# Altium PCB FMC_DIO_32ch_lvds_a.PcbDoc (part 3 of 6)
Units mm, origin at the board's own origin, x right, y up, seen from the top; angles counter-clockwise.
Board outline 69.13 x 77.46 mm, 4 copper layers (Top Layer, G, SUP, Bottom Layer), stack 1.448 mm thick; 558 components, 348 nets, 1996 pads, 784 vias.
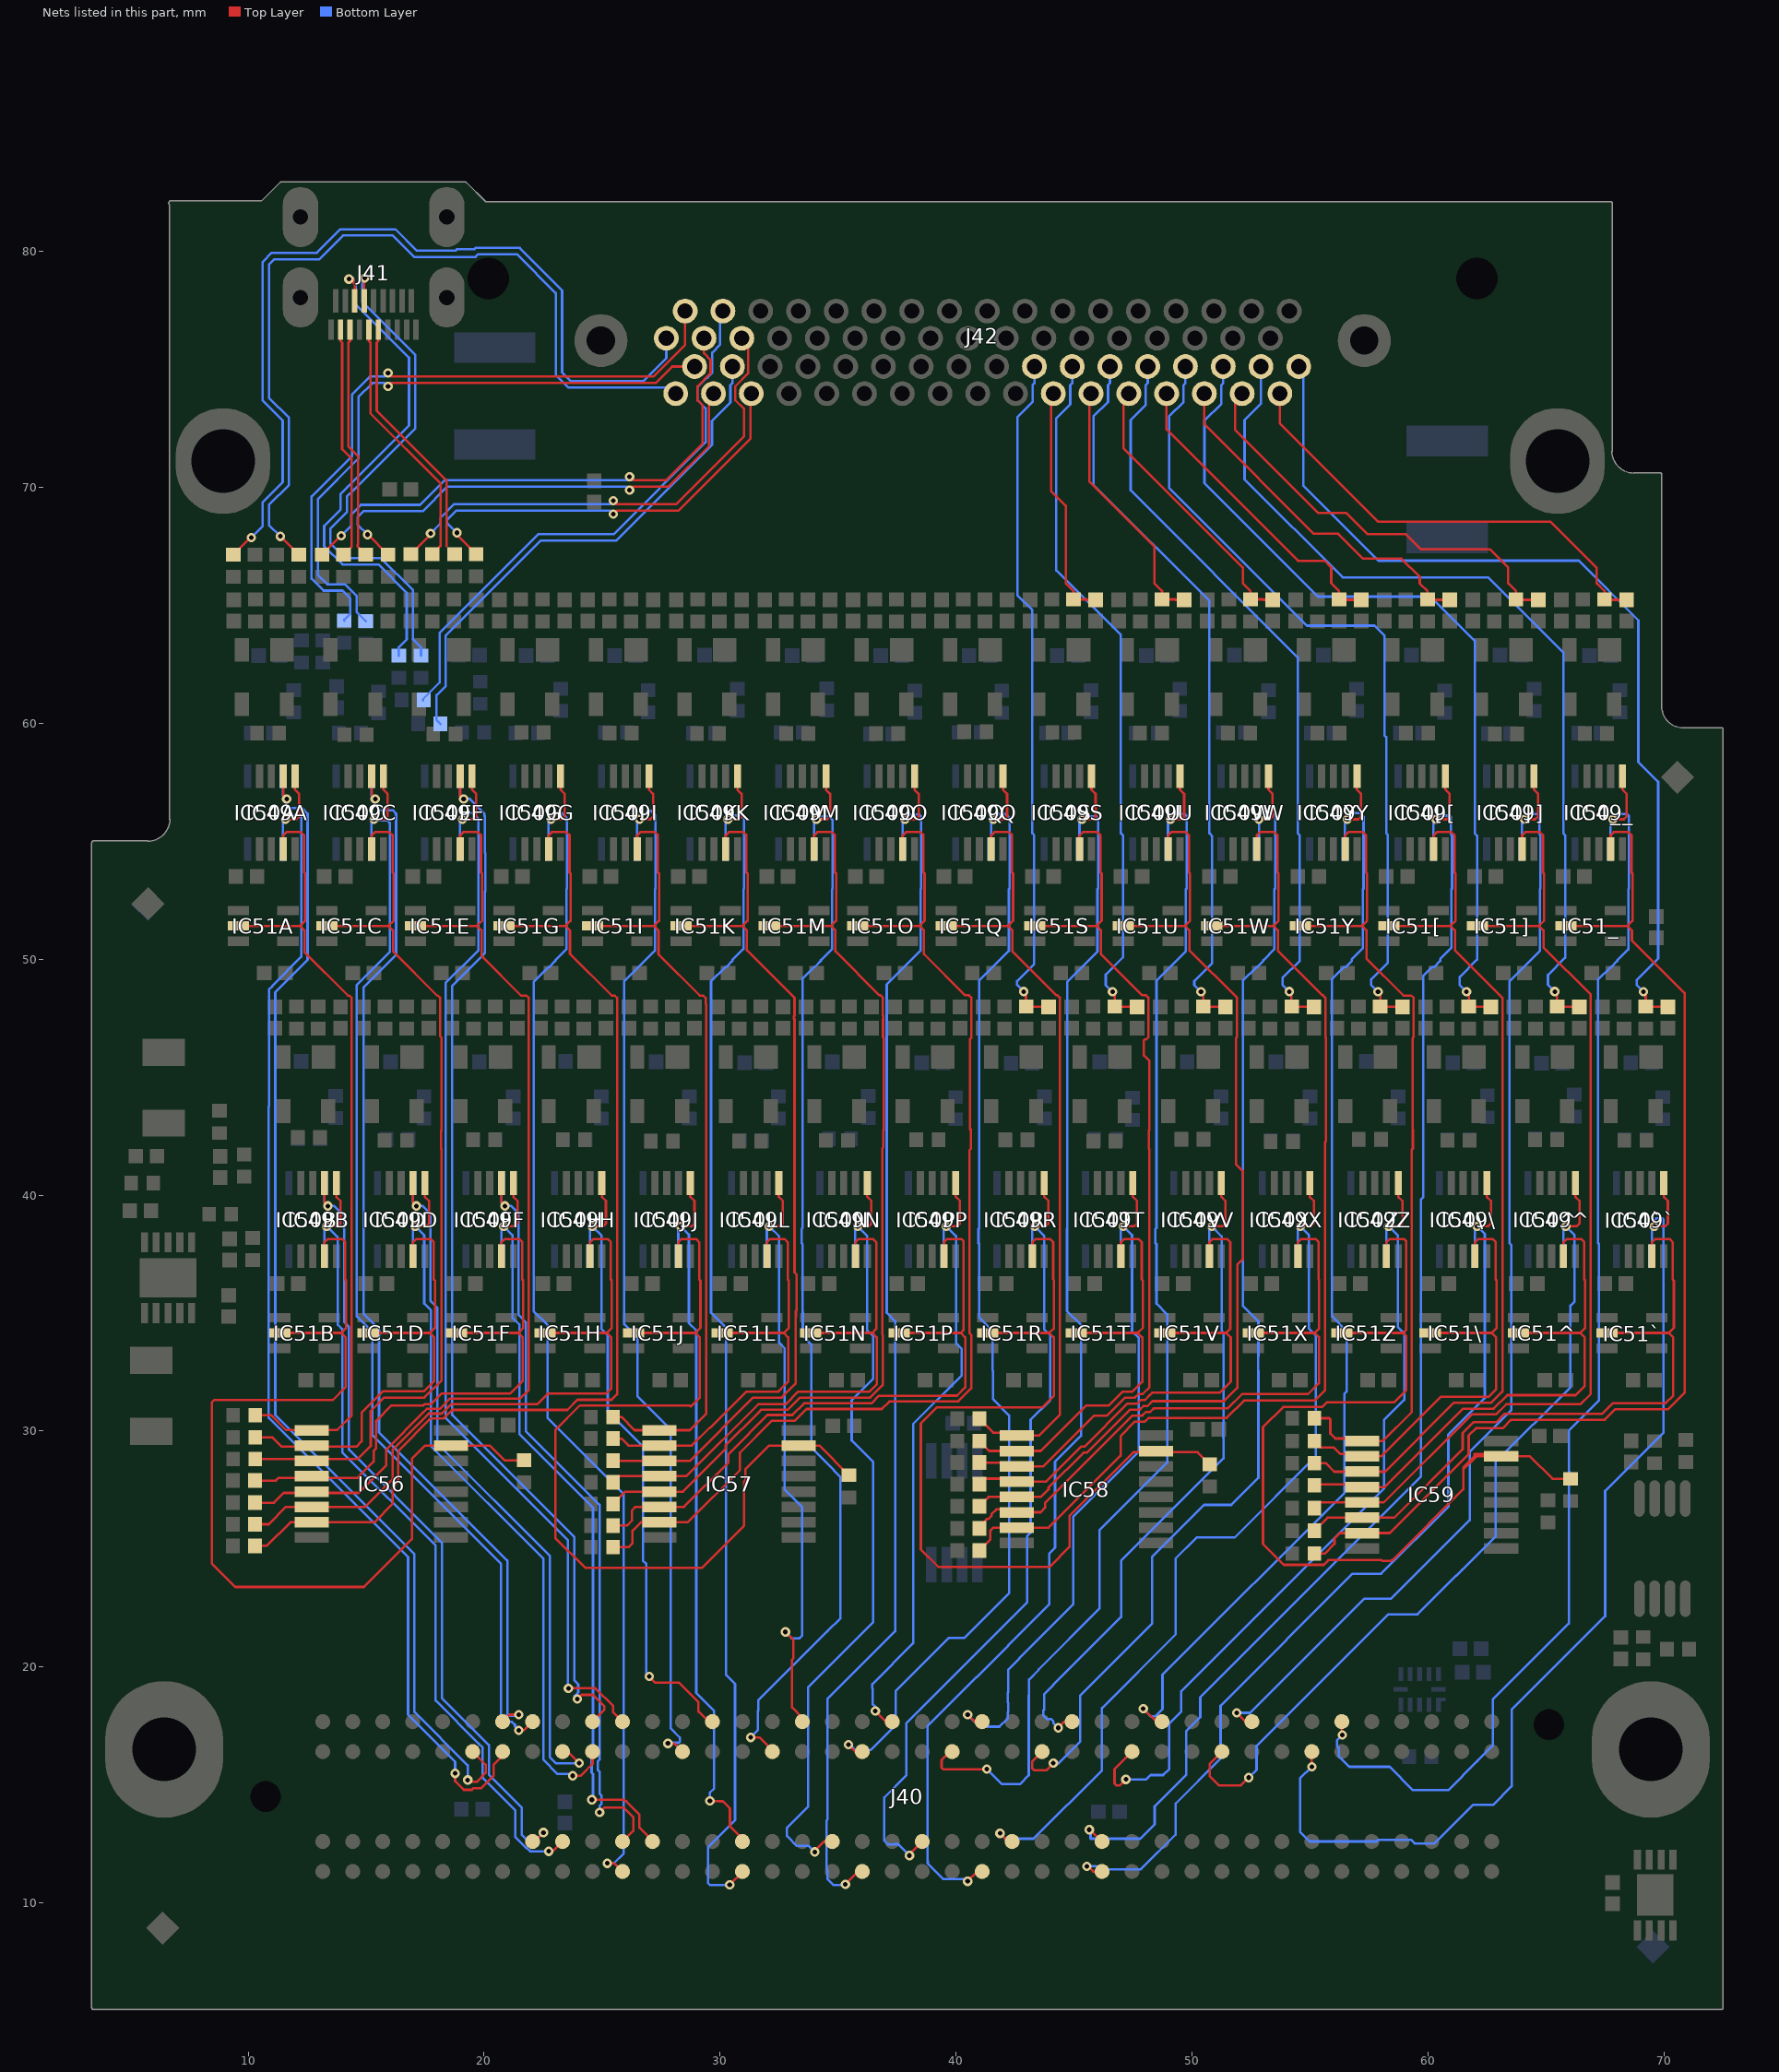
[diagram p5: the nets of this part, all layers, seen from the top]

## Via types
v1: diameter 0.4, hole 0.2, Top Layer to Bottom Layer, tented both sides, 760 vias
v2: diameter 0.4, hole 0.2, Top Layer to Bottom Layer, 24 vias

## Nets (pads, with @x,y where several pads share a name; then routed paths per layer and width w, separated by ;. In a path a pad name is that pad's centre, name@x,y a point inside that pad or via, vN(x,y) a via of type N, cw(c..) or ccw(c..) an arc to the next point about the centre after c; other vN are vias at no path point) (continued)
CON1_P18: C140R.1 J42.20 R243R.1 | length 29.1
  Top Layer w0.102: v1@42.961,48.621 42.961,48.011 R243R.1@42.973,47.999 42.981,47.991 C140R.1@43.9,47.991
  Bottom Layer w0.102: v1(42.866,48.628) 42.58,48.913 42.58,49.073 43.307,49.8 43.307,55.254 43.228,55.333 43.228,64.798 42.596,65.43 42.596,72.974 43.237,73.615 43.237,74.332 43.318,74.413 J42.20@43.318,75.117
CON1_P19: C140S.1 J42.21 R243S.1 | length 9.5
  Top Layer w0.102: 44.018,73.431 44.018,69.846 44.646,69.218 44.646,65.934 44.973,65.608 R243S.1@44.973,65.249 45.522,65.249 45.542,65.229 C140S.1@45.912,65.229
CON1_P20: C140T.1 J42.22 R243T.1 | length 29.9
  Top Layer w0.102: v1@46.723,48.609 R243T.1@46.723,47.999 46.743,47.979 C140T.1@47.662,47.979
  Bottom Layer w0.102: J42.22@44.918,75.117 44.918,74.413 44.837,74.332 44.837,73.514 44.247,72.923 44.247,66.472 46.978,63.741 46.978,55.333 47.066,55.245 47.066,50.076 46.342,49.352 46.342,48.901 v1(46.628,48.616)
CON1_P21: C140U.1 J42.23 R243U.1 | length 11
  Top Layer w0.102: J42.23@45.718,73.967 45.644,73.894 45.644,70.256 48.396,67.504 48.396,65.934 48.723,65.608 R243U.1@48.723,65.249 49.281,65.249 49.301,65.229 C140U.1@49.662,65.229
CON1_P22: C140V.1 J42.24 R243V.1 | length 30.9
  Top Layer w0.102: v1@50.473,48.609 R243V.1@50.473,47.999 50.493,47.979 C140V.1@51.412,47.979
  Bottom Layer w0.102: J42.24@46.518,75.117 46.518,74.413 46.437,74.332 46.437,73.615 45.822,73 45.822,70.1 50.728,65.194 50.728,55.333 50.851,55.21 50.851,49.832 50.092,49.073 50.092,48.901 v1(50.378,48.616)
CON1_P23: C140W.1 J42.25 R243W.1 | length 12
  Top Layer w0.102: J42.25@47.318,73.967 47.092,73.741 47.092,71.653 52.146,66.599 52.146,65.934 52.473,65.608 R243W.1@52.473,65.249 53.015,65.249 53.035,65.229 C140W.1@53.412,65.229
CON1_P24: C140X.1 J42.26 R243X.1 | length 31.7
  Top Layer w0.102: v1@54.211,48.621 54.211,48.011 R243X.1@54.223,47.999 54.231,47.991 C140X.1@55.15,47.991
  Bottom Layer w0.102: J42.26@48.118,75.117 48.118,74.413 48.037,74.332 48.037,73.488 47.396,72.847 47.396,69.872 54.478,62.79 54.478,55.333 54.559,55.252 54.559,49.929 53.83,49.2 53.83,48.913 v1(54.116,48.628)
CON1_P25: C140Y.1 J42.27 R243Y.1 | length 13.4
  Top Layer w0.102: J42.27@48.918,73.967 48.918,72.456 54.486,66.888 55.612,66.888 55.896,66.604 55.896,65.934 56.223,65.608 R243Y.1@56.223,65.249 56.243,65.229 C140Y.1@57.162,65.229
CON1_P26: C140Z.1 J42.28 R243Z.1 | length 34.3
  Top Layer w0.102: v1@57.973,48.609 R243Z.1@57.973,47.999 57.993,47.979 C140Z.1@58.912,47.979
  Bottom Layer w0.102: J42.28@49.718,75.117 49.718,74.413 49.637,74.332 49.637,73.615 49.022,73 49.022,69.977 54.864,64.135 57.734,64.135 58.15,63.719 58.15,59.489 58.228,59.411 58.228,55.333 58.293,55.268 58.293,49.85 57.592,49.149 57.592,48.901 v1(57.878,48.616)
CON1_P27: C140[.1 J42.29 R243[.1 | length 15.1
  Top Layer w0.102: J42.29@50.518,73.967 50.518,72.669 55.159,68.027 56.196,68.027 57.246,66.977 58.868,66.977 59.646,66.198 59.646,65.919 59.973,65.592 R243[.1@59.973,65.249 59.993,65.229 C140[.1@60.912,65.229
CON1_P28: C140\.1 J42.30 R243\.1 | length 36.4
  Top Layer w0.102: v1@61.723,48.609 R243\.1@61.723,47.999 61.743,47.979 C140\.1@62.662,47.979
  Bottom Layer w0.102: J42.30@51.318,75.117 51.318,74.413 51.237,74.332 51.237,73.538 50.521,72.822 50.521,70.18 55.334,65.367 60.105,65.367 61.978,63.494 61.978,55.333 62.078,55.233 62.078,49.986 61.342,49.251 61.342,48.901 v1(61.628,48.616)
CON1_P29: C140].1 J42.31 R243].1 | length 18.1
  Top Layer w0.102: J42.31@52.118,73.967 51.816,73.666 51.816,72.441 55.35,68.907 56.535,68.907 57.424,68.018 59.05,68.018 59.694,67.373 62.62,67.373 63.396,66.597 63.396,65.934 63.723,65.608 R243].1@63.723,65.249 63.743,65.229 C140].1@64.662,65.229
CON1_P30: C140^.1 J42.32 R243^.1 | length 38
  Top Layer w0.102: v1@65.461,48.621 65.461,48.011 R243^.1@65.473,47.999 65.481,47.991 C140^.1@66.4,47.991
  Bottom Layer w0.102: J42.32@52.918,75.117 52.918,73.546 52.222,72.851 52.222,70.333 56.375,66.18 62.544,66.18 65.728,62.995 65.728,55.333 65.811,55.25 65.811,50.058 65.08,49.327 65.08,48.913 v1(65.366,48.628)
CON1_P31: C140_.1 J42.33 R243_.1 | length 19.6
  Top Layer w0.102: J42.33@53.718,73.967 53.718,72.698 57.874,68.542 65.185,68.542 67.146,66.581 67.146,65.934 67.473,65.608 R243_.1@67.473,65.249 67.493,65.229 C140_.1@68.412,65.229
CON1_P32: C140`.1 J42.34 R243`.1 | length 39.8
  Top Layer w0.102: v1@69.223,48.609 R243`.1@69.223,47.999 69.243,47.979 C140`.1@70.162,47.979
  Bottom Layer w0.102: J42.34@54.518,75.117 54.712,74.923 54.712,70.066 57.887,66.891 66.379,66.891 68.91,64.36 68.91,58.353 69.748,57.514 69.748,50.03 68.842,49.124 68.842,48.901 v1(69.128,48.616)
CON1R1_N: J42.35 R267.1 | length 37.4
  Top Layer w0.102: R267.1@9.373,67.145 10.096,67.869 v1(10.135,67.869)
  Bottom Layer w0.102: v1(10.135,67.869) 10.617,68.351 10.617,69.366 11.463,70.211 11.463,72.831 10.617,73.677 10.617,79.549 11.002,79.934 12.907,79.934 13.91,80.937 16.239,80.937 17.149,80.027 18.79,80.027 18.849,80.086 19.581,80.086 19.637,80.142 21.505,80.142 23.304,78.342 23.304,74.867 23.673,74.498 26.746,74.498 27.718,75.47 J42.35@27.718,76.317
CON1R1_P: J42.1 R266.2 | length 36.2
  Top Layer w0.102: v1(11.367,67.92) R266.2@12.141,67.145
  Bottom Layer w0.102: v1(11.367,67.92) 10.884,68.402 10.884,69.255 11.73,70.101 11.73,72.942 10.884,73.787 10.884,79.439 11.112,79.667 13.018,79.667 14.021,80.67 16.129,80.67 17.039,79.761 19.633,79.761 19.747,79.875 21.395,79.875 23.038,78.232 23.038,74.756 23.562,74.231 27.853,74.231 J42.1@28.118,73.967
CON1R2_N: J42.36 R272.1 | length 28.1
  Top Layer w0.102: v1(15.926,74.838) 16.075,74.689 27.165,74.689 28.518,76.041 J42.36@28.518,77.467
  Bottom Layer w0.102: R272.1@14.072,64.351 14.072,64.389 14.329,64.647 14.329,65.287 13.995,65.621 13.195,65.621 12.687,66.129 12.687,69.607 14.409,71.329 14.409,73.939 15.159,74.689 15.777,74.689 v1(15.926,74.838)
CON1R2_P: J42.2 R271.2 | length 26.4
  Top Layer w0.102: v1(15.926,74.273) 16.075,74.422 27.276,74.422 27.971,75.117 J42.2@28.918,75.117
  Bottom Layer w0.102: R271.2@14.986,64.326 14.596,64.715 14.596,65.397 14.106,65.888 13.351,65.888 12.954,66.284 12.954,69.497 14.676,71.219 14.676,73.828 15.27,74.422 15.777,74.422 v1(15.926,74.273)
CON1R3_N: J42.37 R277.1 | length 23.4
  Top Layer w0.102: R277.1@13.132,67.145 13.932,67.945 v1(13.945,67.945) ; v1(26.162,70.444) 26.311,70.294 27.699,70.294 29.261,71.857 29.261,73.466 29.04,73.687 29.04,74.282 29.595,74.837 29.595,75.398 29.318,75.675 J42.37@29.318,76.317
  Bottom Layer w0.102: v1(13.945,67.945) 14.37,68.37 14.37,68.843 14.78,69.253 17.285,69.253 18.326,70.294 26.035,70.294 26.162,70.421 v1(26.162,70.444)
CON1R3_P: J42.3 R276.2 | length 20.7
  Top Layer w0.102: v1(15.062,67.996) 15.075,67.996 R276.2@15.926,67.145 ; v1(26.162,69.879) 26.311,70.028 27.809,70.028 29.527,71.746 29.527,73.777 J42.3@29.718,73.967
  Bottom Layer w0.102: v1(15.062,67.996) 14.637,68.421 14.637,68.732 14.891,68.986 17.395,68.986 18.437,70.028 26.035,70.028 26.162,69.901 v1(26.162,69.879)
CON1R4_N: J42.38 R282.1 | length 23.9
  Bottom Layer w0.102: R282.1@17.412,60.96 17.412,61.024 18.11,61.722 18.11,63.826 22.292,68.008 25.493,68.008 29.388,71.904 29.388,73.339 29.04,73.687 29.04,74.248 29.437,74.645 29.458,74.645 29.667,74.854 29.667,75.709 29.995,76.037 29.995,77.345 J42.38@30.118,77.467
CON1R4_P: J42.4 R281.2 | length 22.3
  Bottom Layer w0.102: R281.2@18.148,59.969 17.984,60.134 17.984,61.189 18.377,61.582 18.377,61.912 ; 18.377,61.925 18.377,61.912 ; J42.4@30.518,75.117 30.518,74.413 30.437,74.332 30.437,73.592 29.654,72.809 29.654,71.793 25.603,67.742 22.403,67.742 18.364,63.703 18.364,61.925 18.377,61.912
CON1R5_N: J42.39 R287.1 | length 21.2
  Top Layer w0.102: R287.1@16.891,67.17 17.767,68.047 v1(17.729,68.047) ; v1(25.476,69.428) 25.625,69.278 28.13,69.278 31.013,72.161 31.013,73.314 30.64,73.687 30.64,74.282 31.195,74.837 31.195,76.04 J42.39@30.918,76.317
  Bottom Layer w0.102: v1(17.729,68.047) 18.155,68.472 18.155,68.716 18.717,69.278 25.327,69.278 v1(25.476,69.428)
CON1R5_P: J42.5 R286.2 | length 18.3
  Top Layer w0.102: v1(18.847,68.072) 18.847,67.983 R286.2@19.66,67.17 ; v1(25.476,68.863) 25.625,69.012 28.241,69.012 31.28,72.051 31.28,73.93 J42.5@31.318,73.967
  Bottom Layer w0.102: v1(18.847,68.072) 18.421,68.497 18.421,68.605 18.828,69.012 25.327,69.012 v1(25.476,68.863)
DATA0_N: J41.11 R285.1 | length 10.4
  Top Layer w0.102: J41.11@15.516,76.68 15.516,76.2 15.45,76.133 15.45,73.243 18.415,70.278 18.415,67.501
DATA0_P: J41.9 R288.2 | length 10.9
  Top Layer w0.102: J41.9@15.116,76.68 15.116,76.2 15.183,76.133 15.183,73.133 18.148,70.168 18.148,67.513 R288.2@17.805,67.17
DATA1_N: J41.8 R280.1 | length 22
  Top Layer w0.102: J41.8@14.916,77.905 14.916,78.8 14.983,78.867 v1(14.935,78.867)
  Bottom Layer w0.102: 14.486,69.908 14.186,69.608 14.186,68.948 13.487,68.25 13.487,67.611 14.106,66.992 15.63,66.992 16.986,65.636 16.986,63.557 17.323,63.221 R280.1@17.323,62.865 ; 14.486,69.909 17.082,72.504 17.082,75.603 14.834,77.851 14.834,78.74 v1@14.961,78.867 ; v1(14.935,78.867) v1@14.961,78.867 ; v1@14.983,78.867 v1@14.961,78.867
DATA1_P: J41.6 R283.2 | length 22.5
  Top Layer w0.102: v1@14.27,78.792 v1(14.27,78.822) 14.27,78.846 14.249,78.867 14.418,78.867 14.469,78.815 14.469,78.674 14.516,78.627 J41.6@14.516,77.905
  Bottom Layer w0.102: 13.953,69.753 13.919,69.719 13.919,69.059 13.221,68.36 13.221,67.501 13.995,66.726 15.519,66.726 16.72,65.526 16.72,63.557 16.383,63.221 R283.2@16.383,62.865 ; 13.954,69.753 14.219,70.018 ; 14.219,70.019 16.815,72.615 16.815,75.493 14.567,77.741 14.567,78.576 14.469,78.674 14.469,78.838 14.44,78.867 14.249,78.867 14.27,78.846 v1(14.27,78.822) v1@14.27,78.792
DATA2_N: J41.5 R275.1 | length 9.9
  Top Layer w0.102: J41.5@14.316,76.68 14.316,76.2 14.25,76.133 14.25,71.726 14.656,71.319 14.656,67.581 14.643,67.568 14.643,67.488 R275.1@14.986,67.145
DATA2_P: J41.3 R278.2 | length 9.9
  Top Layer w0.102: J41.3@13.916,76.68 13.916,76.2 13.983,76.133 13.983,71.615 14.376,71.222 14.376,67.475 R278.2@14.046,67.145
EN1_RX1: IC49A.3 IC51A.2 IC56.1 R257.1 | length 34.4
  Top Layer w0.102: IC51A.2@9.586,51.411 12.196,51.411 ; R257.1@10.3,30.674 10.982,30.674 11.608,30.048 13.767,30.048 14.387,30.669 14.387,48.358 14.291,48.454 14.233,48.454 12.386,50.301 12.386,50.978 12.386,51.221 12.196,51.411 ; IC49A.3@11.486,54.661 11.486,55.252 11.623,55.389 12.231,55.389 12.365,55.255 12.365,53.678 12.413,53.63 12.413,51.628 12.196,51.411
EN1_RX2: IC49B.3 IC51B.2 IC56.15 R256.1 | length 41.7
  Top Layer w0.102: IC51B.2@11.336,34.161 13.946,34.161 ; IC49B.3@13.236,37.411 13.236,38.002 13.373,38.139 13.981,38.139 14.115,38.005 14.115,36.428 14.146,36.397 14.146,34.361 13.946,34.161 ; R256.1@21.768,28.766 20.866,28.766 20.244,29.387 IC56.15@18.596,29.387 17.5,29.387 16.942,28.829 16.942,25.425 14.91,23.393 9.449,23.393 8.458,24.384 8.458,31.217 8.56,31.318 13.589,31.318 14.136,31.866 14.136,33.971 13.946,34.161
EN1_RX3: IC49C.3 IC51C.2 IC56.3 R259.1 | length 38.5
  Top Layer w0.102: R259.1@10.3,28.82 14.646,28.82 15.196,29.369 15.196,30.849 15.766,31.42 17.468,31.42 18.186,32.138 18.186,41.959 ; IC51C.2@13.336,51.411 15.946,51.411 ; IC49C.3@15.236,54.661 15.236,55.252 15.373,55.389 15.981,55.389 16.115,55.255 16.115,53.678 16.163,53.63 16.163,51.628 15.946,51.411 ; 18.176,41.969 18.176,42.737 18.186,42.737 18.186,46.679 18.137,46.728 18.137,48.358 18.041,48.454 18.017,48.454 16.136,50.335 16.136,51.221 15.946,51.411
EN1_RX4: IC49D.3 IC51D.2 IC56.2 R258.1 | length 19.9
  Top Layer w0.102: R258.1@10.3,29.734 11.033,29.734 11.43,29.337 14.58,29.337 14.808,29.566 14.808,30.785 15.709,31.686 17.447,31.686 17.886,32.125 17.886,33.971 17.696,34.161 ; IC51D.2@15.086,34.161 17.696,34.161 ; IC49D.3@16.986,37.411 16.986,38.002 17.123,38.139 17.731,38.139 17.865,38.005 17.865,36.428 17.913,36.38 17.913,34.378 17.696,34.161
EN1_RX5: IC49E.3 IC51E.2 IC56.5 R261.1 | length 42.8
  Top Layer w0.102: R261.1@10.292,26.966 11.091,26.966 11.506,27.381 14.681,27.381 15.85,28.55 15.85,29.226 17.39,30.767 17.568,30.945 17.847,30.945 18.118,30.945 18.542,31.369 21.514,31.369 21.888,31.743 21.888,48.358 21.791,48.454 21.573,48.454 19.886,50.141 19.886,51.221 19.696,51.411 ; IC51E.2@17.086,51.411 19.696,51.411 ; IC49E.3@18.986,54.661 18.986,55.252 19.123,55.389 19.731,55.389 19.865,55.255 19.865,53.678 19.913,53.63 19.913,51.628 19.696,51.411
EN1_RX6: IC49F.3 IC51F.2 IC56.4 R260.1 | length 24.3
  Top Layer w0.102: R260.1@10.292,27.905 11.176,27.905 11.287,28.016 14.63,28.016 15.316,28.702 15.316,29.166 15.425,29.275 15.425,30.436 16.078,31.09 17.425,31.09 17.484,31.148 17.763,31.148 18.212,31.598 21.109,31.598 21.636,32.125 21.636,33.971 21.446,34.161 ; IC51F.2@18.836,34.161 21.446,34.161 ; IC49F.3@20.736,37.411 20.736,38.002 20.873,38.139 21.481,38.139 21.615,38.005 21.615,36.428 21.646,36.397 21.646,34.361 21.446,34.161
EN1_RX7: IC49G.3 IC51G.2 IC56.7 R263.1 | length 48.2
  Top Layer w0.102: R263.1@10.292,25.137 10.786,25.137 11.786,26.137 IC56.7@12.696,26.137 15.342,26.137 16.129,26.924 16.129,27.642 16.358,27.871 16.358,29.16 17.737,30.539 18.286,30.539 18.647,30.899 23.528,30.899 23.956,31.327 25.4,31.327 25.638,31.564 25.638,48.358 25.541,48.454 25.409,48.454 23.636,50.227 23.636,51.221 23.446,51.411 ; IC51G.2@20.836,51.411 23.446,51.411 ; IC49G.3@22.736,54.661 22.736,55.252 22.873,55.389 23.481,55.389 23.615,55.255 23.615,53.678 23.663,53.63 23.663,51.628 23.446,51.411
EN1_RX8: IC49H.3 IC51H.2 IC56.6 R262.1 | length 28.8
  Top Layer w0.102: R262.1@10.292,26.051 10.871,26.051 11.607,26.787 IC56.6@12.696,26.787 14.951,26.787 16.129,27.965 16.129,29.218 17.474,30.563 17.653,30.742 17.931,30.742 18.202,30.742 18.601,31.14 22.25,31.14 22.708,31.598 25.171,31.598 25.386,31.813 25.386,33.971 25.196,34.161 ; IC51H.2@22.586,34.161 25.196,34.161 ; IC49H.3@24.486,37.411 24.486,38.002 24.623,38.139 25.231,38.139 25.365,38.005 25.365,36.428 25.396,36.397 25.396,34.361 25.196,34.161
EN1_RX9: IC49I.3 IC51I.2 IC57.1 R269.1 | length 34.3
  Top Layer w0.102: IC51I.2@24.586,51.411 27.196,51.411 ; R269.1@25.464,30.598 25.816,30.598 26.376,30.037 IC57.1@27.428,30.037 28.716,30.037 29.414,30.735 29.414,31.825 29.414,48.081 29.388,48.108 29.388,48.209 ; IC49I.3@26.486,54.661 26.486,55.252 26.623,55.389 27.231,55.389 27.365,55.255 27.365,53.678 27.413,53.63 27.413,51.628 27.196,51.411 ; 29.388,48.209 29.388,48.358 29.291,48.454 29.143,48.454 27.386,50.211 27.386,50.825 27.386,51.221 27.196,51.411
EN1_RX10: IC49J.3 IC51J.2 IC57.15 R264.1 | length 39.3
  Top Layer w0.102: IC51J.2@26.336,34.161 28.946,34.161 ; IC49J.3@28.236,37.411 28.236,38.002 28.373,38.139 28.981,38.139 29.115,38.005 29.115,36.428 29.163,36.38 29.163,34.378 28.946,34.161 ; R264.1@35.458,28.131 34.202,29.387 IC57.15@33.328,29.387 32.08,29.387 31.064,28.372 31.064,27.904 31.005,27.846 31.005,25.976 29.235,24.206 24.282,24.206 23.017,25.471 23.017,30.047 24.056,31.085 28.706,31.085 28.753,31.039 29.136,31.422 29.136,33.971 28.946,34.161
EN1_RX11: IC49K.3 IC51K.2 IC57.3 R279.1 | length 37.6
  Top Layer w0.102: R279.1@25.464,28.743 25.47,28.737 IC57.3@27.428,28.737 28.712,28.737 31.394,31.419 32.613,31.419 33.198,32.004 33.198,34.823 33.209,34.834 33.209,35.084 33.239,35.115 33.239,36.635 33.15,36.725 33.15,47.463 33.125,47.488 33.125,47.571 33.15,47.596 33.15,48.363 31.136,50.377 31.136,51.221 30.946,51.411 ; IC51K.2@28.336,51.411 30.946,51.411 ; IC49K.3@30.236,54.661 30.236,55.252 30.373,55.389 30.981,55.389 31.115,55.255 31.115,53.678 31.163,53.63 31.163,51.628 30.946,51.411
EN1_RX12: IC49L.3 IC51L.2 IC57.2 R274.1 | length 19
  Top Layer w0.102: R274.1@25.464,29.683 25.816,29.683 26.112,29.387 IC57.2@27.428,29.387 28.803,29.387 29.566,30.15 29.591,30.15 31.114,31.673 32.47,31.673 32.574,31.777 32.574,31.787 32.886,32.099 32.886,33.971 32.696,34.161 ; IC51L.2@30.086,34.161 32.696,34.161 ; IC49L.3@31.986,37.411 31.986,38.002 32.123,38.139 32.731,38.139 32.865,38.005 32.865,36.428 32.913,36.38 32.913,34.378 32.696,34.161
EN1_RX13: IC49M.3 IC51M.2 IC57.5 R289.1 | length 42.2
  Top Layer w0.102: R289.1@25.464,26.915 25.986,27.437 IC57.5@27.428,27.437 28.431,27.437 30.226,29.232 30.226,29.388 31.625,30.786 31.748,30.91 32.87,30.91 33.38,31.42 34.447,31.42 36.364,31.419 36.89,31.945 36.89,34.076 36.868,34.099 36.868,41.986 ; IC51M.2@32.086,51.411 34.696,51.411 ; IC49M.3@33.986,54.661 33.986,55.252 34.123,55.389 34.731,55.389 34.865,55.255 34.865,53.678 34.913,53.63 34.913,51.628 34.696,51.411 ; 36.913,42.032 36.913,42.75 36.932,42.75 36.932,46.666 36.901,46.696 36.901,47.463 36.906,47.468 36.906,47.591 36.9,47.597 36.9,48.363 36.796,48.467 36.75,48.467 34.886,50.331 34.886,51.221 34.696,51.411
EN1_RX14: IC49N.3 IC51N.2 IC57.4 R284.1 | length 23.3
  Top Layer w0.102: R284.1@25.464,27.829 25.722,28.087 IC57.4@27.428,28.087 28.566,28.087 31.617,31.139 32.775,31.139 33.31,31.674 34.552,31.674 ; IC51N.2@33.836,34.161 36.446,34.161 ; 34.553,31.673 35.32,31.673 ; 35.321,31.674 35.452,31.674 ; 35.453,31.673 36.331,31.673 36.636,31.979 36.636,33.971 36.446,34.161 ; IC49N.3@35.736,37.411 35.736,38.002 35.873,38.139 36.481,38.139 36.614,38.007 36.614,34.328 36.446,34.161
EN1_RX15: IC49O.3 IC51O.2 IC57.7 R291.1 | length 47.5
  Top Layer w0.102: R291.1@25.464,25.086 26.127,25.086 26.289,25.248 26.289,25.781 26.645,26.137 IC57.7@27.428,26.137 28.626,26.137 30.836,28.346 30.836,29.083 32.193,30.44 33.162,30.44 33.659,30.937 34.247,30.937 ; 34.248,30.936 36.851,30.936 37.17,31.255 39.566,31.255 39.574,31.263 40.096,31.263 40.64,31.808 40.64,34.076 40.564,34.153 40.564,34.427 40.568,34.432 40.568,35.19 40.564,35.194 40.564,36.727 40.568,36.732 40.568,38.09 40.564,38.094 40.564,41.91 ; IC51O.2@35.836,51.411 38.446,51.411 ; IC49O.3@37.736,54.661 37.736,55.252 37.873,55.389 38.481,55.389 38.615,55.255 38.615,53.678 38.663,53.63 38.663,51.628 38.446,51.411 ; 40.618,41.964 40.618,42.785 40.585,42.785 40.585,46.605 40.65,46.67 40.65,48.363 40.546,48.467 40.382,48.467 38.636,50.213 38.636,51.221 38.446,51.411
EN1_RX16: IC49P.3 IC51P.2 IC57.6 R290.1 | length 28.3
  Top Layer w0.102: R290.1@25.464,26 26.061,26 26.264,26.203 26.264,26.635 26.416,26.787 IC57.6@27.428,26.787 28.46,26.787 30.353,28.68 30.353,29.018 30.467,29.132 30.467,29.146 32.002,30.681 33.062,30.681 33.559,31.178 34.347,31.178 ; 34.348,31.178 36.41,31.178 36.728,31.496 39.466,31.496 39.474,31.504 40.039,31.504 40.386,31.852 40.386,33.971 40.196,34.161 ; IC51P.2@37.586,34.161 40.196,34.161 ; IC49P.3@39.486,37.411 39.486,38.002 39.623,38.139 40.231,38.139 40.31,38.061 40.31,37.989 40.314,37.984 40.314,36.837 40.31,36.833 40.31,35.089 40.314,35.084 40.314,34.537 40.31,34.533 40.31,34.274 40.196,34.161
EN1_RX17: IC49Q.3 IC51Q.2 IC58.1 R293.1 | length 33.9
  Top Layer w0.102: IC51Q.2@39.586,51.411 42.196,51.411 ; R293.1@40.983,30.521 41.569,29.936 IC58.1@42.686,29.936 ; IC49Q.3@41.486,54.661 41.486,55.252 41.623,55.389 42.231,55.389 42.365,55.255 42.365,53.678 42.413,53.63 42.413,51.628 42.196,51.411 ; IC58.1@42.567,29.809 43.499,29.809 44.4,30.71 44.4,48.363 44.296,48.467 44.243,48.467 42.386,50.324 42.386,51.221 42.196,51.411
EN1_RX18: IC49R.3 IC51R.2 IC58.15 R292.1 | length 37.9
  Top Layer w0.102: IC51R.2@41.336,34.161 43.946,34.161 ; IC49R.3@43.236,37.411 43.236,38.002 43.373,38.139 43.981,38.139 44.115,38.005 44.115,36.428 44.146,36.397 44.146,34.361 43.946,34.161 ; R292.1@50.749,28.588 50.229,29.108 47.507,29.108 44.806,26.407 44.806,25.086 43.972,24.252 39.238,24.252 38.506,24.984 38.506,30.328 39.188,31.009 43.658,31.009 44.136,31.487 44.136,33.971 43.946,34.161
EN1_RX19: IC49S.3 IC51S.2 IC58.3 R295.1 | length 37.6
  Top Layer w0.102: R295.1@40.983,28.667 42.408,28.667 IC58.3@42.567,28.509 43.698,28.509 44.347,29.157 45.844,30.655 46.396,30.655 47.16,31.419 47.575,31.419 47.728,31.572 47.904,31.572 48.188,31.856 48.188,41.939 ; IC51S.2@43.336,51.411 45.946,51.411 ; IC49S.3@45.236,54.661 45.236,55.252 45.373,55.389 45.981,55.389 46.115,55.255 46.115,53.678 46.163,53.63 46.163,51.628 45.946,51.411 ; 48.163,41.964 48.163,42.756 48.188,42.756 48.188,45.691 47.955,45.923 47.955,46.558 47.989,46.592 48.046,46.592 48.15,46.696 48.15,48.363 48.046,48.467 47.875,48.467 46.136,50.206 46.136,51.221 45.946,51.411
EN1_RX20: IC49T.3 IC51T.2 IC58.2 R294.1 | length 18.6
  Top Layer w0.102: R294.1@40.983,29.582 41.406,29.159 IC58.2@42.567,29.159 43.586,29.159 45.517,31.09 46.471,31.09 47.055,31.673 47.47,31.673 47.886,32.089 47.886,33.971 47.696,34.161 ; IC51T.2@45.086,34.161 47.696,34.161 ; IC49T.3@46.986,37.411 46.986,38.002 47.123,38.139 47.731,38.139 47.865,38.005 47.865,36.428 47.913,36.38 47.913,34.378 47.696,34.161
EN1_RX21: IC49U.3 IC51U.2 IC58.5 R297.1 | length 41.9
  Top Layer w0.102: R297.1@40.983,26.813 41.379,27.209 IC58.5@42.567,27.209 43.592,27.209 43.917,27.534 43.917,27.606 45.393,29.083 45.542,29.083 47.37,30.911 47.786,30.911 47.939,31.064 48.115,31.064 48.318,31.267 51.35,31.267 51.917,31.835 51.917,37.058 52.146,37.287 52.146,41.021 51.868,41.3 51.868,42.746 51.853,42.746 51.853,46.648 51.9,46.696 51.9,48.363 49.886,50.377 49.886,51.221 49.696,51.411 ; IC51U.2@47.086,51.411 49.696,51.411 ; IC49U.3@48.986,54.661 48.986,55.252 49.123,55.389 49.731,55.389 49.865,55.255 49.865,53.678 49.913,53.63 49.913,51.628 49.696,51.411
EN1_RX22: IC49V.3 IC51V.2 IC58.4 R296.1 | length 22.9
  Top Layer w0.102: R296.1@40.983,27.753 41.216,27.986 IC58.4@42.686,27.986 ; IC58.4@42.567,27.859 43.81,27.859 45.288,29.337 45.437,29.337 47.265,31.165 47.68,31.165 47.834,31.318 48.01,31.318 48.225,31.534 48.315,31.623 51.17,31.623 51.636,32.089 51.636,33.971 51.446,34.161 ; IC51V.2@48.836,34.161 51.446,34.161 ; IC49V.3@50.736,37.411 50.736,38.002 50.873,38.139 51.481,38.139 51.615,38.005 51.615,34.33 51.446,34.161
EN1_RX23: IC49W.3 IC51W.2 IC58.7 R299.1 | length 46.9
  Top Layer w0.102: R299.1@40.983,24.933 41.451,25.401 41.451,25.781 41.578,25.909 IC58.7@42.567,25.909 43.917,25.909 46.968,28.96 46.968,29.791 47.581,30.403 47.996,30.403 48.149,30.556 49.829,30.556 49.834,30.561 51.466,30.561 52.197,31.293 55.194,31.293 55.626,31.725 55.626,42.24 ; IC51W.2@50.836,51.411 53.446,51.411 ; IC49W.3@52.736,54.661 52.736,55.252 52.873,55.389 53.481,55.389 53.615,55.255 53.615,53.678 53.663,53.63 53.663,51.628 53.446,51.411 ; 55.663,42.277 55.663,42.738 55.669,42.738 55.669,46.678 55.65,46.697 55.65,48.363 55.546,48.467 55.52,48.467 53.636,50.351 53.636,51.221 53.446,51.411
EN1_RX24: IC49X.3 IC51X.2 IC58.6 R298.1 | length 27.6
  Top Layer w0.102: R298.1@40.983,25.873 40.983,25.962 41.295,26.274 41.368,26.274 41.502,26.408 41.502,26.481 41.707,26.686 IC58.6@42.686,26.686 ; IC58.6@42.567,26.559 43.577,26.559 43.764,26.746 43.764,26.946 47.475,30.657 47.891,30.657 48.044,30.81 48.22,30.81 48.372,30.963 51.508,30.963 52.117,31.572 54.915,31.572 55.372,32.029 55.372,33.985 55.196,34.161 ; IC51X.2@52.586,34.161 55.196,34.161 ; IC49X.3@54.486,37.411 54.486,38.002 54.623,38.139 55.231,38.139 55.365,38.005 55.365,36.428 55.372,36.421 55.372,34.337 55.196,34.161
EN1_RX25: IC49Y.3 IC51Y.2 IC59.1 R301.1 | length 35.3
  Top Layer w0.102: IC51Y.2@54.586,51.411 57.196,51.411 ; R301.1@55.182,30.547 55.813,30.547 55.855,30.505 55.855,29.896 56.065,29.686 57.197,29.686 IC59.1@57.197,29.58 58.079,29.58 59.309,30.81 59.309,41.924 ; IC49Y.3@56.486,54.661 56.486,55.252 56.623,55.389 57.231,55.389 57.365,55.255 57.365,53.678 57.413,53.63 57.413,51.628 57.196,51.411 ; 59.355,41.969 59.355,42.772 59.348,42.772 59.348,46.661 59.387,46.701 59.387,48.358 59.291,48.454 58.962,48.454 57.386,50.03 57.386,51.221 57.196,51.411
EN1_RX26: IC49Z.3 IC51Z.2 IC59.15 R300.1 | length 40.4
  Top Layer w0.102: IC51Z.2@56.336,34.161 58.946,34.161 ; IC49Z.3@58.236,37.411 58.236,38.002 58.373,38.139 58.981,38.139 59.068,38.053 59.068,34.282 58.946,34.161 ; IC59.15@63.086,29.036 61.98,29.036 61.959,29.015 61.959,28.927 61.493,28.462 61.493,28.372 ; R300.1@66.04,27.978 65.265,27.978 64.313,28.93 IC59.15@63.097,28.93 62.052,28.93 61.493,28.372 ; 58.946,34.161 59.068,34.039 59.068,31.725 58.56,31.217 55.702,31.217 55.507,31.022 53.856,31.022 53.002,30.167 53.002,25.217 53.883,24.336 53.896,24.336 53.899,24.333 55.575,24.333 55.778,24.536 58.016,24.536 58.05,24.503 58.435,24.503 58.468,24.536 58.496,24.536 61.493,27.534 61.493,28.372
EN1_RX27: IC49[.3 IC51[.2 IC59.3 R303.1 | length 38.3
  Top Layer w0.102: R303.1@55.182,28.642 55.661,28.642 56.023,28.28 IC59.3@57.197,28.28 58.176,28.28 61.1,31.204 62.674,31.204 63.15,31.68 63.15,48.363 61.136,50.377 61.136,51.221 60.946,51.411 ; IC51[.2@58.336,51.411 60.946,51.411 ; IC49[.3@60.236,54.661 60.236,55.252 60.373,55.389 60.981,55.389 61.115,55.255 61.115,53.678 61.163,53.63 61.163,51.628 60.946,51.411
EN1_RX28: IC49\.3 IC51\.2 IC59.2 R302.1 | length 19.7
  Top Layer w0.102: R302.1@55.182,29.582 55.461,29.302 56.007,29.302 56.273,29.036 IC59.2@57.186,29.036 ; IC59.2@57.197,28.93 58.013,28.93 60.541,31.458 62.569,31.458 62.886,31.775 62.886,33.971 62.696,34.161 ; IC51\.2@60.086,34.161 62.696,34.161 ; IC49\.3@61.986,37.411 61.986,38.002 62.123,38.139 62.731,38.139 62.865,38.005 62.865,36.428 62.896,36.397 62.896,34.361 62.696,34.161
EN1_RX29: IC49].3 IC51].2 IC59.5 R305.1 | length 42.6
  Top Layer w0.102: R305.1@55.182,26.737 55.425,26.98 IC59.5@57.197,26.98 58.12,26.98 61.849,30.709 62.879,30.709 63.311,31.14 66.456,31.14 66.887,31.572 66.887,48.505 64.886,50.506 64.886,51.221 64.696,51.411 ; IC51].2@62.086,51.411 64.696,51.411 ; IC49].3@63.986,54.661 63.986,55.252 64.123,55.389 64.731,55.389 64.865,55.255 64.865,53.678 64.913,53.63 64.913,51.628 64.696,51.411
EN1_RX30: IC49^.3 IC51^.2 IC59.4 R304.1 | length 23.8
  Top Layer w0.102: R304.1@55.182,27.702 R304.1@55.376,27.507 ; R304.1@55.376,27.736 IC59.4@57.186,27.736 ; IC59.4@57.197,27.63 58.161,27.63 61.481,30.95 62.779,30.95 63.351,31.521 66.243,31.521 66.636,31.915 66.636,33.971 66.446,34.161 ; IC51^.2@63.836,34.161 66.446,34.161 ; IC49^.3@65.736,37.411 65.736,38.002 65.873,38.139 66.481,38.139 66.615,38.005 66.615,36.428 66.646,36.397 66.646,34.361 66.446,34.161
EN1_RX31: IC49_.3 IC51_.2 IC59.7 R307.1 | length 48
  Top Layer w0.102: R307.1@55.182,24.811 55.621,24.811 56.032,25.222 56.032,25.451 56.261,25.68 IC59.7@57.197,25.68 58.37,25.68 61.717,29.027 61.717,29.815 62.027,30.124 63.17,30.124 63.525,30.48 67.488,30.48 67.94,30.932 70.175,30.932 70.866,31.623 70.866,48.565 68.636,50.794 68.636,51.221 68.446,51.411 ; IC51_.2@65.836,51.411 68.446,51.411 ; IC49_.3@67.736,54.661 67.736,55.252 67.873,55.389 68.481,55.389 68.615,55.255 68.615,53.678 68.663,53.63 68.663,51.628 68.446,51.411
EN1_RX32: IC49`.3 IC51`.2 IC59.6 R306.1 | length 28.9
  Top Layer w0.102: R306.1@55.182,25.772 55.74,26.33 IC59.6@57.197,26.33 58.563,26.33 61.463,29.231 61.463,29.92 61.922,30.378 62.89,30.378 63.246,30.734 67.383,30.734 67.835,31.186 70.07,31.186 70.386,31.503 70.386,33.971 70.196,34.161 ; IC51`.2@67.586,34.161 70.196,34.161 ; IC49`.3@69.486,37.411 69.486,38.002 69.623,38.139 70.231,38.139 70.365,38.005 70.365,36.428 70.413,36.38 70.413,34.378 70.196,34.161
FMC1_N1: IC49A.5 IC50A.1 J40.g7 | length 52.3
  Top Layer w0.102: v1(11.581,55.927) 12.039,55.927 12.161,56.049 12.161,57.009 11.986,57.184 IC49A.5@11.986,57.761 ; v1(18.771,15.494) 18.771,15.16 19.132,14.798 19.476,14.798 19.55,14.872 19.875,14.872 20.396,15.392 20.396,15.85 20.782,16.236 J40.g7@20.782,16.416
  Bottom Layer w0.102: IC50A.1@11.478,54.661 v1@11.478,55.824 ; v1(11.581,55.927) 11.763,56.109 12.192,56.109 12.251,56.049 12.251,50.097 11.023,48.869 11.023,48.851 10.884,48.712 10.884,43.766 10.871,43.753 10.871,30.567 16.777,24.662 16.777,17.982 18.771,15.988 v1(18.771,15.494)
FMC1_N2: IC49B.5 IC50B.1 J40.d9 | length 35.2
  Top Layer w0.102: v1(13.331,38.677) 13.789,38.677 13.911,38.799 13.911,39.759 13.736,39.934 IC49B.5@13.736,40.511 ; v1(22.733,12.192) 22.908,12.192 J40.d9@23.322,12.606
  Bottom Layer w0.102: IC50B.1@13.228,37.411 v1@13.228,38.574 ; v1(13.331,38.677) 13.805,38.203 13.805,34.503 13.988,34.319 13.988,29.101 17.945,25.144 17.945,18.58 19.765,16.76 19.934,16.591 19.934,16.095 19.934,15.307 21.323,13.917 21.323,12.793 21.784,12.332 21.806,12.332 21.946,12.192 v1(22.733,12.192)
FMC1_N3: IC49C.5 IC50C.1 J40.h8 | length 47
  Top Layer w0.102: v1(15.331,55.927) 15.789,55.927 15.911,56.049 15.911,57.009 15.736,57.184 IC49C.5@15.736,57.761 ; v1(21.463,17.323) 21.689,17.323 J40.h8@22.052,17.686
  Bottom Layer w0.102: IC50C.1@15.228,54.661 v1@15.228,55.824 ; v1@15.392,55.866 15.407,55.88 15.9,55.88 16.001,55.779 16.001,50.306 14.605,48.909 14.605,34.86 15.265,34.199 15.265,29.831 20.716,24.38 20.716,17.834 20.872,17.678 21.181,17.678 21.291,17.567 21.311,17.567 21.311,17.475 v1(21.463,17.323)
FMC1_N4: IC49D.5 IC50D.1 J40.g10 | length 31.5
  Top Layer w0.102: v1(17.081,38.677) 17.539,38.677 17.661,38.799 17.661,39.759 17.486,39.934 IC49D.5@17.486,40.511 ; v1(23.749,15.392) 24.083,15.392 24.592,15.901 J40.g10@24.592,16.416
  Bottom Layer w0.102: IC50D.1@16.978,37.411 v1@16.978,38.574 ; v1(17.081,38.677) 17.462,38.296 17.462,35.408 17.738,35.132 17.738,29.364 22.504,24.598 22.504,16.078 23.114,15.469 23.673,15.469 v1(23.749,15.392)
FMC1_N5: IC49E.5 IC50E.1 J40.h11 | length 47.1
  Top Layer w0.102: v1(19.081,55.927) 19.539,55.927 19.661,56.049 19.661,57.009 19.486,57.184 IC49E.5@19.486,57.761 ; v1(23.571,19.101) 24.714,19.101 25.463,18.352 25.463,18.085 J40.h11@25.862,17.686
  Bottom Layer w0.102: IC50E.1@18.978,54.661 v1@18.978,55.824 ; v1(19.081,55.927) 19.339,56.185 19.533,56.185 19.764,55.953 19.764,50.385 18.364,48.985 18.364,30.567 23.546,25.386 v1@23.546,19.101
FMC1_N6: IC49F.5 IC50F.1 J40.d12 | length 33.1
  Top Layer w0.102: v1(20.831,38.677) 21.289,38.677 21.411,38.799 21.411,39.759 21.236,39.934 IC49F.5@21.236,40.511 ; v1(24.562,14.376) 25.933,14.376 25.997,14.313 26.018,14.313 26.581,13.75 26.581,13.195 27.132,12.644 J40.d12@27.132,12.606
  Bottom Layer w0.102: IC50F.1@20.728,37.411 v1@20.728,38.574 ; v1(20.831,38.677) 21.196,38.312 21.196,34.815 21.488,34.523 21.488,29.881 24.613,26.757 24.613,16.181 24.554,16.122 24.554,15.526 24.613,15.468 v1@24.613,14.376
FMC1_N7: IC49G.5 IC50G.1 J40.c11 | length 52.2
  Top Layer w0.102: v1(22.831,55.927) 23.289,55.927 23.411,56.049 23.411,57.009 23.236,57.184 IC49G.5@23.236,57.761 ; v1(25.222,11.684) 25.514,11.684 J40.c11@25.862,11.336
  Bottom Layer w0.102: IC50G.1@22.728,54.661 v1@22.728,55.824 ; v1(22.831,55.927) 23.089,56.185 23.292,56.185 23.514,55.963 23.514,52.994 23.488,52.968 23.488,50.427 23.016,49.955 23.016,49.927 22.751,49.662 22.723,49.662 22.098,49.036 22.098,35.089 22.682,34.504 22.682,30.567 25.908,27.341 25.908,12.09 25.502,11.684 v1(25.222,11.684)
FMC1_N8: IC49H.5 IC50H.1 J40.h14 | length 27.4
  Top Layer w0.102: v1(24.581,38.677) 25.039,38.677 25.161,38.799 25.161,39.759 24.986,39.934 IC49H.5@24.986,40.511 ; v1(27,19.609) 27,19.583 27.245,19.339 28.261,19.339 29.083,18.517 29.083,18.11 29.507,17.686 J40.h14@29.672,17.686
  Bottom Layer w0.102: IC50H.1@24.478,37.411 v1@24.478,38.574 ; v1(24.581,38.677) 24.978,38.28 24.978,34.326 25.238,34.065 25.238,30.83 26.738,29.33 26.738,25.132 26.725,25.119 26.725,24.513 26.873,24.365 26.873,19.736 v1(27,19.609)
FMC1_N9: IC49I.5 IC50I.1 J40.g13 | length 46.6
  Top Layer w0.102: v1(26.581,55.927) 27.039,55.927 27.161,56.049 27.161,57.009 26.986,57.184 IC49I.5@26.986,57.761 ; v1(27.788,16.764) 28.054,16.764 J40.g13@28.402,16.416
  Bottom Layer w0.102: IC50I.1@26.478,54.661 v1@26.478,55.824 ; v1(26.581,55.927) 26.941,56.286 27.076,56.286 27.264,56.099 27.264,52.994 27.238,52.968 27.238,50.367 25.933,49.062 25.933,34.53 26.492,33.971 26.492,31.482 27.91,30.064 27.91,17.399 28.296,17.013 28.296,16.84 28.245,16.789 v1@27.762,16.789
FMC1_N10: IC49J.5 IC50J.1 J40.d15 | length 31.2
  Top Layer w0.102: v1(28.331,38.677) 28.789,38.677 28.911,38.799 28.911,39.759 28.736,39.934 IC49J.5@28.736,40.511 ; v1(29.566,14.326) 29.972,14.326 29.988,14.31 30.119,14.31 30.362,14.066 30.362,14.058 30.416,14.004 30.416,13.246 30.942,12.72 J40.d15@30.942,12.606
  Bottom Layer w0.102: IC50J.1@28.228,37.411 v1@28.228,38.574 ; v1(28.331,38.677) 28.677,38.331 28.677,34.58 28.988,34.269 28.988,18.902 29.743,18.147 29.743,14.859 29.566,14.681 v1(29.566,14.326)
FMC1_N11: IC49K.5 IC50K.1 J40.c15 | length 52.6
  Top Layer w0.102: v1(30.331,55.927) 30.789,55.927 30.911,56.049 30.911,57.009 30.736,57.184 IC49K.5@30.736,57.761 ; v1(30.404,10.77) 30.942,11.308 J40.c15@30.942,11.336
  Bottom Layer w0.102: IC50K.1@30.228,54.661 v1@30.228,55.824 ; v1@30.251,10.77 29.566,10.77 29.486,10.85 29.486,12.362 30.632,13.509 30.632,19.29 30.251,19.671 30.251,34.377 29.616,35.012 29.616,49.062 30.216,49.662 30.251,49.662 30.516,49.927 30.516,49.962 30.988,50.434 30.988,52.968 31.014,52.994 31.014,55.956 30.886,56.083 30.488,56.083 v1(30.331,55.927)
FMC1_N12: IC49L.5 IC50L.1 J40.h17 | length 26.5
  Top Layer w0.102: v1(32.081,38.677) 32.539,38.677 32.661,38.799 32.661,39.759 32.486,39.934 IC49L.5@32.486,40.511 ; v1(32.766,21.488) 33.106,21.149 33.106,20.376 33.045,20.316 33.045,18.288 33.482,17.851 J40.h17@33.482,17.686
  Bottom Layer w0.102: IC50L.1@31.978,37.411 v1@31.978,38.574 ; v1(32.081,38.677) 32.503,38.255 32.503,33.742 32.738,33.507 32.738,27.521 33.477,26.783 33.477,21.336 33.363,21.222 33.283,21.222 33.033,21.222 v1(32.766,21.488)
FMC1_N13: IC49M.5 IC50M.1 J40.g16 | length 47.3
  Top Layer w0.102: v1(31.293,17.018) 31.674,17.018 32.212,16.48 J40.g16@32.212,16.416 ; v1(34.081,55.927) 34.539,55.927 34.661,56.049 34.661,57.009 34.486,57.184 IC49M.5@34.486,57.761
  Bottom Layer w0.102: v1(31.293,17.018) 31.597,17.323 31.597,18.135 31.61,18.148 31.61,18.58 34.548,21.518 35.103,22.073 35.103,28.046 34.819,28.33 ; IC50M.1@33.978,54.661 v1@33.978,55.824 ; v1(34.081,55.927) 34.212,56.058 34.595,56.058 34.764,55.889 34.764,52.994 34.738,52.968 34.738,50.425 34.266,49.953 34.266,49.927 34.001,49.662 33.976,49.662 33.499,49.185 33.499,38.624 33.448,38.574 33.448,37.967 33.499,37.916 33.499,35.041 33.503,35.037 33.503,34.036 33.858,33.681 33.858,29.402 33.871,29.389 33.871,29.297 34.828,28.339
FMC1_N14: IC49N.5 IC50N.1 J40.d18 | length 34.4
  Top Layer w0.102: v1(34.011,12.167) 33.985,12.192 34.399,12.606 J40.d18@34.752,12.606 ; v1(35.831,38.677) 36.289,38.677 36.411,38.799 36.411,39.759 36.236,39.934 IC49N.5@36.236,40.511
  Bottom Layer w0.102: v1@33.985,12.192 33.757,12.421 33.252,12.421 32.829,12.844 32.829,13.191 33.731,14.093 33.731,19.151 36.488,21.909 36.488,28.688 35.573,29.604 35.573,31.302 36.488,32.217 36.488,34.015 36.228,34.275 36.228,38.28 v1(35.831,38.677) ; IC50N.1@35.728,37.411 v1@35.728,38.574
FMC1_N15: IC49O.5 IC50O.1 J40.c19 | length 53.2
  Top Layer w0.102: v1(35.306,10.795) 35.847,11.336 J40.c19@36.022,11.336 ; v1(37.831,55.927) 38.289,55.927 38.411,56.049 38.411,57.009 38.236,57.184 IC49O.5@38.236,57.761
  Bottom Layer w0.102: v1(35.306,10.795) 35.281,10.77 34.798,10.77 34.544,11.024 34.544,11.409 34.506,11.447 34.506,13.496 34.544,13.534 34.544,18.643 37.42,21.519 37.42,34.651 37.058,35.012 37.058,48.935 38.488,50.365 38.488,52.968 38.514,52.994 38.514,56.05 38.43,56.134 38.039,56.134 v1(37.831,55.927) ; IC50O.1@37.728,54.661 v1@37.728,55.824
FMC1_N16: IC49P.5 IC50P.1 J40.h20 | length 26.9
  Top Layer w0.102: v1(36.576,18.136) 37.026,17.686 J40.h20@37.292,17.686 ; v1(39.581,38.677) 40.039,38.677 40.161,38.799 40.161,39.759 39.986,39.934 IC49P.5@39.986,40.511
  Bottom Layer w0.102: v1(36.576,18.136) 36.576,18.327 36.462,18.441 36.462,19.088 36.449,19.101 36.449,19.278 38.176,21.006 38.176,30.302 40.238,32.364 40.238,33.481 39.992,33.727 39.992,38.266 v1(39.581,38.677) ; IC50P.1@39.478,37.411 v1@39.478,38.574
FMC1_N17: IC49Q.5 IC50Q.1 J40.g19 | length 49.6
  Top Layer w0.102: v1(35.433,16.713) 35.73,16.416 J40.g19@36.022,16.416 ; v1(41.581,55.927) 42.039,55.927 42.161,56.049 42.161,57.009 41.986,57.184 IC49Q.5@41.986,57.761
  Bottom Layer w0.102: v1(35.433,16.713) 35.509,16.713 35.738,16.485 36.373,16.485 37.427,17.539 37.427,17.822 37.44,17.835 37.44,18.981 39.697,21.238 40.355,21.238 42.24,23.124 42.24,30.669 41.605,31.304 41.605,31.322 41.558,31.37 41.558,32.548 41.545,32.561 41.545,34.249 40.97,34.823 40.97,37.946 40.948,37.967 40.948,38.574 40.97,38.595 40.97,49.087 42.238,50.355 42.238,52.968 42.264,52.994 42.264,55.983 42.088,56.159 41.814,56.159 v1(41.581,55.927) ; IC50Q.1@41.478,54.661 v1@41.478,55.824
FMC1_N18: IC49R.5 IC50R.1 J40.d21 | length 34.9
  Top Layer w0.102: v1(38.024,12.014) 38.024,12.067 J40.d21@38.562,12.606 ; v1(43.331,38.677) 43.789,38.677 43.911,38.799 43.911,39.759 43.736,39.934 IC49R.5@43.736,40.511
  Bottom Layer w0.102: v1(38.024,12.014) 37.546,12.492 37.38,12.492 37.372,12.484 37.151,12.484 37.144,12.492 37.108,12.492 36.952,12.648 36.952,14.469 37.897,15.414 37.897,17.627 41.326,21.057 41.671,21.402 43.007,22.738 43.007,25.551 43.154,25.698 43.154,30.48 43.988,31.314 43.988,34.065 43.728,34.326 43.728,38.28 v1(43.331,38.677) ; IC50R.1@43.228,37.411 v1@43.228,38.574
FMC1_N19: IC49S.5 IC50S.1 J40.c23 | length 54.9
  Top Layer w0.102: v1(40.488,10.922) 40.901,11.336 J40.c23@41.102,11.336 ; v1(45.331,55.927) 45.789,55.927 45.911,56.049 45.911,57.009 45.736,57.184 IC49S.5@45.736,57.761
  Bottom Layer w0.102: v1(40.488,10.922) 40.399,11.011 39.463,11.011 38.798,11.675 38.798,11.773 38.786,11.786 38.786,17.5 40.853,19.567 40.871,19.567 42.201,20.897 42.201,20.916 43.942,22.657 43.942,24.811 44.191,25.06 44.191,28.706 45.288,29.803 45.288,34.504 44.704,35.089 44.698,35.094 44.698,38.574 44.704,38.579 44.704,49.036 45.988,50.321 45.988,52.968 46.014,52.994 46.014,55.967 45.923,56.058 45.462,56.058 v1(45.331,55.927) ; IC50S.1@45.228,54.661 v1@45.228,55.824
FMC1_N20: IC49T.5 IC50T.1 J40.h23 | length 29.8
  Top Layer w0.102: v1(40.488,17.983) 40.785,17.686 J40.h23@41.102,17.686 ; v1(47.081,38.677) 47.539,38.677 47.661,38.799 47.661,39.759 47.486,39.934 IC49T.5@47.486,40.511
  Bottom Layer w0.102: v1(40.488,17.983) 40.996,17.475 41.834,17.475 42.189,17.831 42.189,18.08 42.21,18.101 42.21,18.475 42.189,18.496 42.189,18.923 42.202,18.936 42.202,19.883 42.671,20.351 42.671,20.369 44.958,22.657 44.958,26.365 47.738,29.146 47.738,33.938 47.453,34.224 47.453,38.306 v1(47.081,38.677) ; IC50T.1@46.978,37.411 v1@46.978,38.574
FMC1_N21: IC49U.5 IC50U.1 J40.g22 | length 53.3
  Top Layer w0.102: J40.g22@39.832,16.416 39.733,16.416 39.383,16.066 39.383,15.735 39.446,15.672 v1(41.3,15.672) ; v1(49.081,55.927) 49.539,55.927 49.661,56.049 49.661,57.009 49.486,57.184 IC49U.5@49.486,57.761
  Bottom Layer w0.102: v1(41.3,15.672) 41.935,15.037 42.697,15.037 43.078,15.418 43.078,18.801 43.091,18.814 43.091,19.476 43.497,19.883 43.497,19.901 46.075,22.479 46.075,25.806 48.946,28.676 48.946,34.951 48.488,35.409 48.488,37.927 48.448,37.967 48.448,38.574 48.488,38.614 48.488,49.087 49.738,50.337 49.738,52.968 49.764,52.994 49.764,56.078 49.682,56.159 49.314,56.159 v1(49.081,55.927) ; IC50U.1@48.978,54.661 v1@48.978,55.824
FMC1_N22: IC49V.5 IC50V.1 J40.h26 | length 29.3
  Top Layer w0.102: v1(44.323,17.424) 44.584,17.686 J40.h26@44.912,17.686 ; v1(50.831,38.677) 51.289,38.677 51.411,38.799 51.411,39.759 51.236,39.934 IC49V.5@51.236,40.511
  Bottom Layer w0.102: v1(44.323,17.424) 44.12,17.628 44.12,17.7 44.027,17.793 43.857,17.793 43.701,17.949 43.701,18.17 43.726,18.195 43.726,18.841 44.12,19.235 44.12,19.253 46.99,22.123 46.99,24.511 51.326,28.847 51.326,29.732 51.313,29.745 51.313,30.351 51.326,30.364 51.326,34.178 51.253,34.25 51.253,38.255 v1(50.831,38.677) ; IC50V.1@50.728,37.411 v1@50.728,38.574
FMC1_N23: IC49W.5 IC50W.1 J40.g25 | length 51.7
  Top Layer w0.102: J40.g25@43.642,16.416 43.228,16.002 43.228,15.7 43.307,15.621 43.815,15.621 v1(44.12,15.926) ; v1(52.831,55.927) 53.289,55.927 53.411,56.049 53.411,57.009 53.236,57.184 IC49W.5@53.236,57.761
  Bottom Layer w0.102: v1(44.12,15.926) 44.348,15.926 45.263,16.84 45.263,18.796 48.311,21.844 48.311,24.678 50.506,26.873 51.664,26.873 52.807,28.016 52.807,32.549 52.795,32.561 52.795,33.167 52.807,33.179 52.807,34.657 52.146,35.317 52.146,49.087 52.721,49.662 52.751,49.662 53.016,49.927 53.016,49.957 53.488,50.429 53.488,52.968 53.514,52.994 53.514,56.087 53.391,56.21 53.221,56.21 v1@52.938,55.927 ; IC50W.1@52.728,54.661 52.831,54.764 v1@52.831,55.83
FMC1_N24: IC49X.5 IC50X.1 J40.d24 | length 37.9
  Top Layer w0.102: v1(41.859,12.954) 42.207,12.606 J40.d24@42.372,12.606 ; v1(54.581,38.677) 55.039,38.677 55.161,38.799 55.161,39.759 54.986,39.934 IC49X.5@54.986,40.511
  Bottom Layer w0.102: v1(41.859,12.954) 42.088,12.725 43.282,12.725 46.177,15.621 46.177,18.262 49.301,21.387 49.301,24.597 50.192,25.488 51.802,25.488 55.238,28.924 55.238,34.065 54.94,34.363 54.94,38.318 v1(54.581,38.677) ; IC50X.1@54.478,37.411 v1@54.478,38.574
FMC1_N25: IC49Y.5 IC50Y.1 J40.h29 | length 48.4
  Top Layer w0.102: v1(47.93,18.237) 48.481,17.686 J40.h29@48.722,17.686 ; v1(56.581,55.927) 57.039,55.927 57.161,56.049 57.161,57.009 56.986,57.184 IC49Y.5@56.986,57.761
  Bottom Layer w0.102: v1(47.93,18.237) 48.254,17.913 48.438,17.913 48.743,18.218 48.743,19.674 56.459,27.39 56.459,31.592 56.54,31.674 56.546,31.679 56.546,32.56 56.545,32.561 56.545,33.167 56.546,33.169 56.546,34.245 55.931,34.86 55.931,49.163 56.429,49.662 56.501,49.662 56.766,49.927 56.766,49.999 57.238,50.471 57.238,52.968 57.264,52.994 57.264,56.045 57.125,56.185 56.839,56.185 v1(56.581,55.927) ; IC50Y.1@56.478,54.661 v1@56.478,55.824
FMC1_N26: IC49Z.5 IC50Z.1 J40.g28 | length 35.3
  Top Layer w0.102: v1(47.193,15.24) 46.939,14.986 46.787,14.986 46.711,15.062 46.711,15.674 J40.g28@47.452,16.416 ; v1(58.331,38.677) 58.789,38.677 58.911,38.799 58.911,39.759 58.736,39.934 IC49Z.5@58.736,40.511
  Bottom Layer w0.102: v1(47.193,15.24) 48.053,15.24 48.235,15.422 48.772,15.422 49.035,15.684 49.035,17.611 49.528,18.105 49.528,18.968 58.14,27.58 58.14,30.48 58.988,31.328 58.988,34.142 58.712,34.418 58.712,38.296 v1(58.331,38.677) ; IC50Z.1@58.228,37.411 v1@58.228,38.574
FMC1_N27: IC49[.5 IC50[.1 J40.d27 | length 56.4
  Top Layer w0.102: v1(45.644,13.106) 45.681,13.106 J40.d27@46.182,12.606 ; v1(60.331,55.927) 60.789,55.927 60.911,56.049 60.911,57.009 60.736,57.184 IC49[.5@60.736,57.761
  Bottom Layer w0.102: v1(45.644,13.106) 45.695,13.056 45.695,12.725 47.803,12.725 48.412,13.335 48.412,14.097 49.746,15.43 49.746,17.281 50.345,17.88 50.345,18.722 59.698,28.075 59.698,39.818 59.791,39.911 59.791,49.29 60.163,49.662 60.251,49.662 60.516,49.927 60.516,50.015 60.988,50.487 60.988,52.968 61.014,52.994 61.014,55.244 60.962,55.296 60.962,56.03 60.909,56.083 60.488,56.083 v1(60.331,55.927) ; IC50[.1@60.228,54.661 v1@60.228,55.824
FMC1_N28: IC49\.5 IC50\.1 J40.c27 | length 40.7
  Top Layer w0.102: v1@45.644,11.506 45.814,11.336 J40.c27@46.182,11.336 ; v1(62.081,38.677) 62.539,38.677 62.661,38.799 62.661,39.759 62.486,39.934 IC49\.5@62.486,40.511
  Bottom Layer w0.102: v1(45.542,11.557) 45.923,11.557 46.05,11.43 47.828,11.43 49.301,12.903 49.301,14.22 51.206,16.125 51.206,18.36 56.798,23.952 58.014,23.952 60.858,26.797 60.858,29.856 62.402,31.399 62.402,38.357 v1(62.081,38.677) ; IC50\.1@61.978,37.411 v1@61.978,38.574
FMC1_N29: IC49].5 IC50].1 J40.h32 | length 49.6
  Top Layer w0.102: v1(51.892,18.059) 52.266,17.686 J40.h32@52.532,17.686 ; v1(64.081,55.927) 64.539,55.927 64.661,56.049 64.661,57.009 64.486,57.184 IC49].5@64.486,57.761
  Bottom Layer w0.102: v1(51.892,18.059) 52.462,18.059 57.301,22.898 58.433,22.898 61.76,26.226 61.76,29.121 63.525,30.886 63.525,37.89 63.448,37.967 63.448,49.061 64.738,50.351 64.738,52.968 64.764,52.994 64.764,55.244 64.719,55.289 64.719,56.083 64.643,56.159 64.314,56.159 v1(64.081,55.927) ; IC50].1@63.978,54.661 v1@63.978,55.824
FMC1_N30: IC49^.5 IC50^.1 J40.g31 | length 36.7
  Top Layer w0.102: J40.g31@51.262,16.416 50.749,15.903 50.749,15.367 51.13,14.986 52.07,14.986 v1(52.4,15.316) ; v1(65.831,38.677) 66.289,38.677 66.411,38.799 66.411,39.759 66.236,39.934 IC49^.5@66.236,40.511
  Bottom Layer w0.102: v1(52.4,15.316) 52.73,15.646 52.73,16.659 58.31,22.238 59.554,22.238 61.196,23.88 61.203,23.88 61.439,24.116 61.439,24.122 62.865,25.549 62.865,28.702 66.027,31.864 66.027,35.319 66.204,35.495 66.204,38.304 v1(65.831,38.677) ; IC50^.1@65.728,37.411 v1@65.728,38.574
FMC1_N31: IC49_.5 IC50_.1 J40.h35 | length 55.7
  Top Layer w0.102: J40.h35@56.342,17.686 56.342,17.14 v1(56.363,17.12) ; v1(67.831,55.927) 68.289,55.927 68.411,56.049 68.411,57.009 68.236,57.184 IC49_.5@68.236,57.761
  Bottom Layer w0.102: v1(56.363,17.12) 56.134,16.891 56.134,16.662 56.212,16.584 56.212,16.225 56.664,15.773 58.369,15.773 59.36,14.783 60.852,14.783 62.069,16 62.738,16.669 62.738,18.618 65.962,21.842 65.962,27.882 65.984,27.905 65.984,28.28 65.962,28.302 65.962,30.021 67.234,31.293 67.234,37.932 67.198,37.967 67.198,49.128 67.732,49.662 67.751,49.662 68.016,49.927 68.016,49.946 68.488,50.418 68.488,52.968 68.514,52.994 68.514,56.073 68.428,56.159 68.064,56.159 v1(67.831,55.927) ; IC50_.1@67.728,54.661 v1@67.728,55.824
FMC1_N32: IC49`.5 IC50`.1 J40.g34 | length 44.8
  Top Layer w0.102: v1(55.072,15.778) J40.g34@55.072,16.416 ; v1(69.581,38.677) 70.039,38.677 70.161,38.799 70.161,39.759 69.986,39.934 IC49`.5@69.986,40.511
  Bottom Layer w0.102: v1(55.072,15.778) 54.57,15.277 54.57,13.019 54.982,12.607 57.813,12.607 57.889,12.683 59.27,12.683 59.426,12.527 60.266,12.527 61.9,14.161 62.751,14.161 63.538,14.948 63.538,18.199 67.501,22.162 67.501,27.466 69.978,29.944 69.978,38.963 69.926,39.014 69.672,39.014 69.581,38.924 v1(69.581,38.677) ; IC50`.1@69.478,37.411 v1@69.478,38.574
FMC1_P1: IC49A.6 IC50A.8 J40.g6 | length 50.3
  Top Layer w0.102: IC49A.6@11.486,57.761 11.486,56.936 v1(11.632,56.79) ; v1(19.304,15.214) 19.38,15.138 19.685,15.138 20.066,15.519 20.066,15.862 J40.g6@19.512,16.416
  Bottom Layer w0.102: IC50A.8@11.478,57.761 11.478,56.944 v1(11.632,56.79) 11.632,56.516 11.735,56.413 12.273,56.413 12.518,56.169 12.518,49.969 11.151,48.601 11.151,30.683 17.043,24.79 17.043,18.092 19.304,15.832 v1(19.304,15.214)
FMC1_P2: IC49B.6 IC50B.8 J40.d8 | length 34.1
  Top Layer w0.102: IC49B.6@13.236,40.511 13.236,39.686 v1(13.382,39.54) ; J40.d8@22.052,12.606 22.131,12.606 v1(22.512,12.987)
  Bottom Layer w0.102: IC50B.8@13.228,40.511 13.228,39.694 v1(13.382,39.54) 13.646,39.54 14.072,39.115 14.072,34.613 14.268,34.417 14.268,29.217 18.212,25.273 18.212,18.691 20.201,16.701 20.201,15.435 21.59,14.046 21.59,12.903 21.895,12.598 22.123,12.598 v1(22.512,12.987)
FMC1_P3: IC49C.6 IC50C.8 J40.h7 | length 46
  Top Layer w0.102: IC49C.6@15.236,57.761 15.236,56.936 v1(15.382,56.79) ; J40.h7@20.782,17.686 21.08,17.983 v1(21.463,17.983)
  Bottom Layer w0.102: IC50C.8@15.228,57.761 15.228,56.944 v1(15.382,56.79) 15.382,56.5 15.57,56.312 16.125,56.312 16.268,56.169 16.268,50.177 14.884,48.793 14.884,34.976 15.545,34.315 15.545,29.946 20.983,24.509 20.983,17.944 21.425,17.944 v1(21.463,17.983)
FMC1_P4: IC49D.6 IC50D.8 J40.g9 | length 30.2
  Top Layer w0.102: IC49D.6@16.986,40.511 16.986,39.686 v1(17.132,39.54) ; J40.g9@23.322,16.416 23.538,16.416 v1(24.028,15.926)
  Bottom Layer w0.102: IC50D.8@16.978,40.511 16.978,39.694 v1(17.132,39.54) 17.396,39.54 17.729,39.208 17.729,35.519 18.018,35.23 18.018,29.48 22.784,24.714 22.784,16.18 23.038,15.926 v1(24.028,15.926)
FMC1_P5: IC49E.6 IC50E.8 J40.h10 | length 45.9
  Top Layer w0.102: IC49E.6@18.986,57.761 18.986,56.936 v1(19.132,56.79) ; v1(23.952,18.644) 24.13,18.821 24.616,18.821 25.082,18.355 25.095,18.343 25.095,18.189 J40.h10@24.592,17.686
  Bottom Layer w0.102: IC50E.8@18.978,57.761 18.978,56.944 v1(19.132,56.79) 19.396,56.79 20.018,56.169 20.018,56.077 20.031,56.064 20.031,55.355 20.031,54.512 20.044,54.499 20.044,52.878 20.031,52.865 20.031,50.275 20.018,50.262 20.018,50.244 18.644,48.87 18.644,30.683 23.825,25.501 23.825,19.435 23.987,19.273 23.987,18.929 23.827,18.769 v1(23.952,18.644)
FMC1_P6: IC49F.6 IC50F.8 J40.d11 | length 32.6
  Top Layer w0.102: IC49F.6@20.736,40.511 20.736,39.686 v1(20.882,39.54) ; v1(24.892,13.843) 25.095,14.046 25.908,14.046 26.314,13.64 26.314,13.058 J40.d11@25.862,12.606
  Bottom Layer w0.102: IC50F.8@20.728,40.511 20.728,39.694 v1(20.882,39.54) 21.146,39.54 21.463,39.224 21.463,34.925 21.768,34.62 21.768,29.997 24.892,26.873 24.892,16.083 24.821,16.012 24.821,15.637 24.892,15.565 24.892,14.634 24.978,14.549 24.978,14.204 24.892,14.119 v1(24.892,13.843)